# EAGLE board Main (EAGLE 9.6.2)
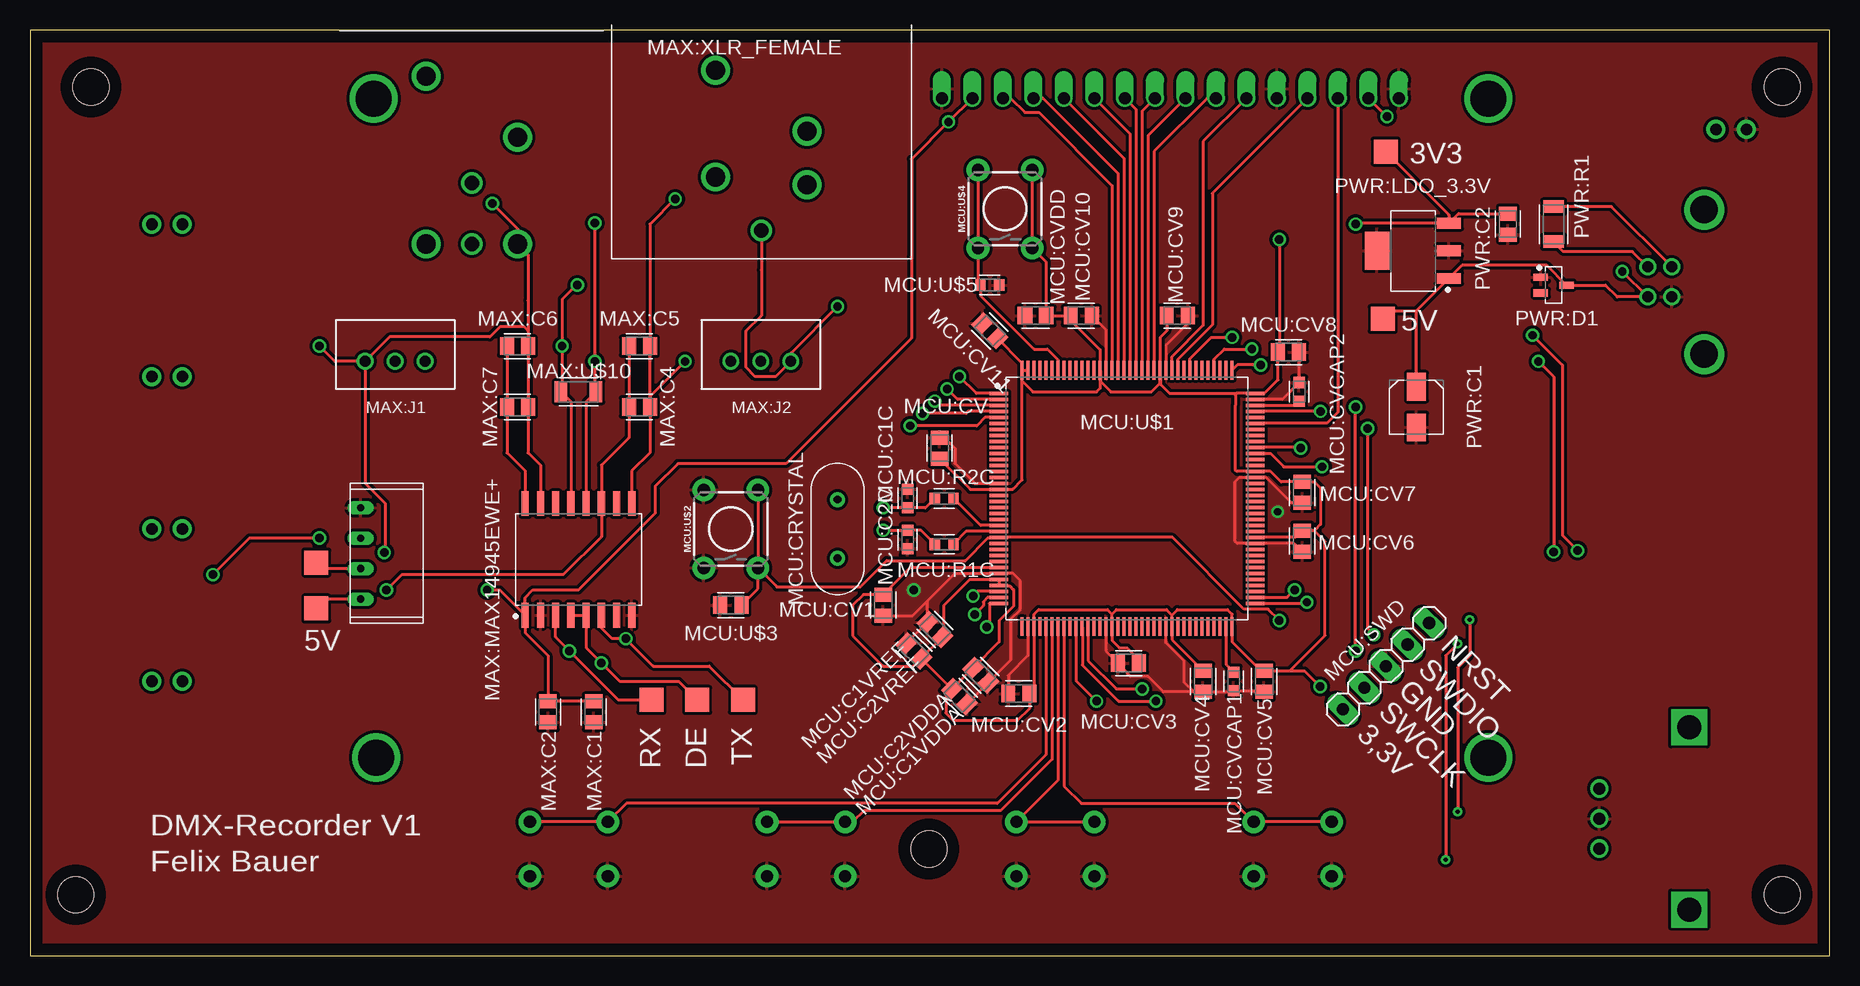
[diagram p0: board, top side]
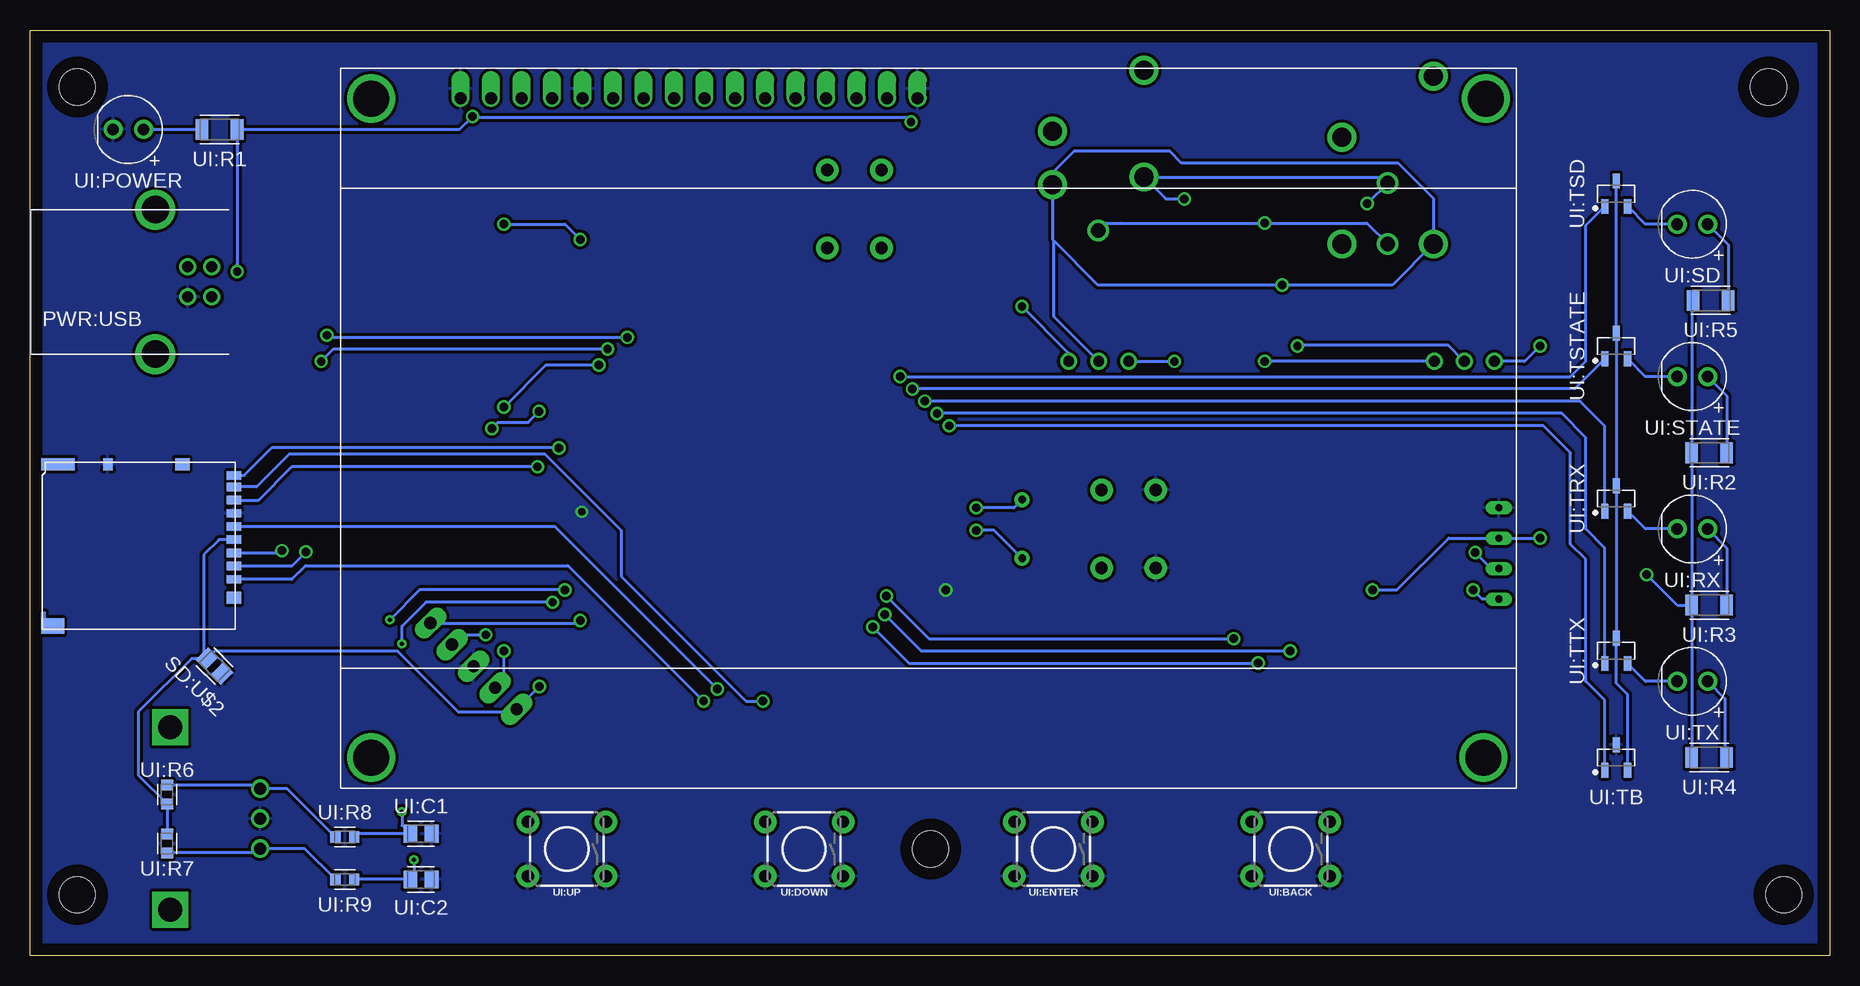
[diagram p1: board, bottom side, seen from below]

Size 150 x 77.14 mm. Coordinates in mm from the lower left corner, seen from the top.
Outline: 0,0 150,0 150,77.14 0,77.14 0,0
Copper layers (1*16): Top 0.035mm / dielectric 1.5mm / Bottom 0.035mm
Design rules "default": minimum track width 6mil, minimum drill 0.35mm, track to track 6mil, track to pad 6mil, pad to pad 6mil, via to via 6mil, smd to smd 6mil, copper to edge 40mil, drill to drill 6mil, minimum pad ring 10mil, minimum via ring 8mil, stop-mask expansion 4mil, vias tented up to drill 0mil, thermal gap 10mil
Holes 3 mm at 5.08,72.39 146.05,72.39 146.05,5.08 3.81,5.08 74.93,8.89

## Footprints (pad centres in the part's own frame; a part is rotated, then mirrored left to right if it is on the bottom)
LCD = drill 1 offset: A 45.56,57.5; D0 25.24,57.5; D1 27.78,57.5; D2 30.32,57.5; D3 32.86,57.5; D4 35.4,57.5; D5 37.94,57.5; D6 40.48,57.5; D7 43.02,57.5; E 22.7,57.5; K 48.1,57.5; RS 17.62,57.5; RW 20.16,57.5; V0 15.08,57.5; VDD 12.54,57.5; VSS 10,57.5 | drill 3: P16 2.54,2.54; P17 95.25,2.54; P18 2.54,57.46; P19 95.46,57.46
CAPC2012X100N = smd 1.165 x 1.465: 1 -0.875,0; 2 0.875,0
CAPC2012X90N = smd 1.165 x 1.465: 1 -0.88,0; 2 0.88,0
5V/5V_DC_CONVERTER_TRACO = drill 0.6 long: +VIN -4.572,-0.889; +VOUT -9.652,-0.889; -VIN -2.032,-0.889; -VOUT -7.112,-0.889
B3B-XH-A = drill 0.9: 1 0,0; 2 2.5,0; 3 5,0
SOIC127P1032X265-16N = smd 2.052 x 0.589: 1 -4.654,4.445; 2 -4.654,3.175; 3 -4.654,1.905; 4 -4.654,0.635; 5 -4.654,-0.635; 6 -4.654,-1.905; 7 -4.654,-3.175; 8 -4.654,-4.445; 9 4.654,-4.445; 10 4.654,-3.175; 11 4.654,-1.905; 12 4.654,-0.635; 13 4.654,0.635; 14 4.654,1.905; 15 4.654,3.175; 16 4.654,4.445
MESSPUNKT = smd 2 x 2: P$1 1,1
RESC3115X56N = smd 1.05 x 1.72: 1 -1.46,0; 2 1.46,0
NC3FAAH-0 = drill 1.6: 1 -3.81,4.45; 2 3.81,3.81; MOUNT -3.81,13.34; MOUNT2 3.81,8.26 | drill 1.2: 3 0,0
NC3MBH-B = drill 1.6: 1 3.81,-17.78; 2 -3.81,-17.78; MH1 3.81,-8.89; MH2 -3.81,-3.81 | drill 1.2: 3 0,-17.78; G 0,-12.7
CAPC1608X97N = smd 0.917 x 0.97: 1 -0.776,0; 2 0.776,0
XTALRR488W43L1077T434H350B = drill 0.63 pad 1.23: 1 -2.44,0; 2 2.44,0
CAPC1608X90N = smd 0.921 x 0.97: 1 -0.775,0; 2 0.775,0
CAPC2012X140N = smd 1.24 x 1.465: 1 -0.885,0; 2 0.885,0
RESC1608X55N = smd 0.87 x 0.979: 1 -0.78,0; 2 0.78,0
1X05 = drill 1.016 long: 1 -5.08,0; 2 -2.54,0; 3 0,0; 4 2.54,0; 5 5.08,0
QFP50P2200X2200X160-144N = smd 1.559 x 0.28: 1 -10.678,8.75; 2 -10.678,8.25; 3 -10.678,7.75; 4 -10.678,7.25; 5 -10.678,6.75; 6 -10.678,6.25; 7 -10.678,5.75; 8 -10.678,5.25; 9 -10.678,4.75; 10 -10.678,4.25; 11 -10.678,3.75; 12 -10.678,3.25; 13 -10.678,2.75; 14 -10.678,2.25; 15 -10.678,1.75; 16 -10.678,1.25; 17 -10.678,0.75; 18 -10.678,0.25; 19 -10.678,-0.25; 20 -10.678,-0.75; 21 -10.678,-1.25; 22 -10.678,-1.75; 23 -10.678,-2.25; 24 -10.678,-2.75; 25 -10.678,-3.25; 26 -10.678,-3.75; 27 -10.678,-4.25; 28 -10.678,-4.75; 29 -10.678,-5.25; 30 -10.678,-5.75; 31 -10.678,-6.25; 32 -10.678,-6.75; 33 -10.678,-7.25; 34 -10.678,-7.75; 35 -10.678,-8.25; 36 -10.678,-8.75; 73 10.678,-8.75; 74 10.678,-8.25; 75 10.678,-7.75; 76 10.678,-7.25; 77 10.678,-6.75; 78 10.678,-6.25; 79 10.678,-5.75; 80 10.678,-5.25; 81 10.678,-4.75; 82 10.678,-4.25; 83 10.678,-3.75; 84 10.678,-3.25; 85 10.678,-2.75; 86 10.678,-2.25; 87 10.678,-1.75; 88 10.678,-1.25; 89 10.678,-0.75; 90 10.678,-0.25; 91 10.678,0.25; 92 10.678,0.75; 93 10.678,1.25; 94 10.678,1.75; 95 10.678,2.25; 96 10.678,2.75; 97 10.678,3.25; 98 10.678,3.75; 99 10.678,4.25; 100 10.678,4.75; 101 10.678,5.25; 102 10.678,5.75; 103 10.678,6.25; 104 10.678,6.75; 105 10.678,7.25; 106 10.678,7.75; 107 10.678,8.25; 108 10.678,8.75 | smd 0.28 x 1.559: 37 -8.75,-10.678; 38 -8.25,-10.678; 39 -7.75,-10.678; 40 -7.25,-10.678; 41 -6.75,-10.678; 42 -6.25,-10.678; 43 -5.75,-10.678; 44 -5.25,-10.678; 45 -4.75,-10.678; 46 -4.25,-10.678; 47 -3.75,-10.678; 48 -3.25,-10.678; 49 -2.75,-10.678; 50 -2.25,-10.678; 51 -1.75,-10.678; 52 -1.25,-10.678; 53 -0.75,-10.678; 54 -0.25,-10.678; 55 0.25,-10.678; 56 0.75,-10.678; 57 1.25,-10.678; 58 1.75,-10.678; 59 2.25,-10.678; 60 2.75,-10.678; 61 3.25,-10.678; 62 3.75,-10.678; 63 4.25,-10.678; 64 4.75,-10.678; 65 5.25,-10.678; 66 5.75,-10.678; 67 6.25,-10.678; 68 6.75,-10.678; 69 7.25,-10.678; 70 7.75,-10.678; 71 8.25,-10.678; 72 8.75,-10.678; 109 8.75,10.678; 110 8.25,10.678; 111 7.75,10.678; 112 7.25,10.678; 113 6.75,10.678; 114 6.25,10.678; 115 5.75,10.678; 116 5.25,10.678; 117 4.75,10.678; 118 4.25,10.678; 119 3.75,10.678; 120 3.25,10.678; 121 2.75,10.678; 122 2.25,10.678; 123 1.75,10.678; 124 1.25,10.678; 125 0.75,10.678; 126 0.25,10.678; 127 -0.25,10.678; 128 -0.75,10.678; 129 -1.25,10.678; 130 -1.75,10.678; 131 -2.25,10.678; 132 -2.75,10.678; 133 -3.25,10.678; 134 -3.75,10.678; 135 -4.25,10.678; 136 -4.75,10.678; 137 -5.25,10.678; 138 -5.75,10.678; 139 -6.25,10.678; 140 -6.75,10.678; 141 -7.25,10.678; 142 -7.75,10.678; 143 -8.25,10.678; 144 -8.75,10.678
TACTILE_SWITCH_PTH_6.0MM = drill 1.016 pad 1.88: 1 -3.251,2.261; 2 3.251,2.261; 3 -3.251,-2.261; 4 3.251,-2.261
CAPAE430X610N = smd 2.312 x 1.579: 1 -1.7,0; 2 1.7,0
SOT65P237X111-3N = smd 1.198 x 0.602: 1 -1.077,0.65; 2 -1.077,-0.65; 3 1.077,0
SOT230P700X180-4N = smd 2.029 x 0.889: GND1 -2.99,0; VIN -2.99,2.3; VOUT -2.99,-2.3 | smd 2.029 x 3.189: GND2 2.99,0
USB-TYPE_B_CONNECTOR = drill 0.92: D+ 1.25,1; D- 1.25,-1; GND -1.25,1; VCC -1.25,-1 | drill 2.3: MH1 -6.02,3.71; MH2 6.02,3.71
DM3AT-SF-PEJM5 = smd 1 x 0.8: CARD_DETECTION_SWITCH(A) -9.6,-9.9 | smd 0.7 x 1.2: CARD_DETECTION_SWITCH(B) -8.65,0.6; CD/DAT3 -1.1,0.6; CLK -4.4,0.6; CMD -2.2,0.6; DAT0 -6.6,0.6; DAT1 -7.7,0.6; DAT2 0,0.6; VDD -3.3,0.6; VSS -5.5,0.6 | smd 1 x 1.2: MOUNT1 1.55,0.6; MOUNT5 -9.6,-3.7 | smd 1.3 x 1.9: MOUNT2 3.9,-14.5 | smd 1 x 2.8: MOUNT3 -9.6,-14.05
CAPC2012X145N = smd 1.133 x 1.465: 1 -0.891,0; 2 0.891,0
EC12E2420404 = drill 1: A -2.5,0; B 2.5,0; C 0,0 | drill 2 square: MH1 -7.6,7.5; MH2 7.6,7.5
LED_5MM_BLUE = drill 0.981 pad 1.581: 1 -1.27,0; 2 1.27,0
LED_5MM_YELLOW = drill 0.981 pad 1.581: 1 -1.27,0; 2 1.27,0
LED_5MM_GREEN = drill 0.981 pad 1.581: 1 -1.27,0; 2 1.27,0
LED_5MM_RED = drill 0.981 pad 1.581: 1 -1.27,0; 2 1.27,0
SOT95P237X111-3N = smd 1.232 x 0.602: 1 -1.06,0.95; 2 -1.06,-0.95; 3 1.06,0

## Placement (x,y rotation side)
LCD:U$1  LCD_4X202004A  [LCD]  124.11,13.97 0 bottom
MAX:C1  1uF  [CAPC2012X100N]  46.99,20.32 270 top
MAX:C2  0.1uF  [CAPC2012X90N]  43.18,20.32 270 top
MAX:C4  0.1uF  [CAPC2012X90N]  50.8,45.72 0 top
MAX:C5  1uF  [CAPC2012X100N]  50.8,50.8 0 top
MAX:C6  0.1uF  [CAPC2012X90N]  40.64,50.8 0 top
MAX:C7  1uF  [CAPC2012X100N]  40.64,45.72 0 top
MAX:DC/DC  CONVERTER_5V/5V_DCTRACO  [5V/5V_DC_CONVERTER_TRACO]  26.67,39.37 90 top
MAX:J1  3A/250V  [B3B-XH-A]  27.94,49.53 0 top
MAX:J2  3A/250V  [B3B-XH-A]  58.42,49.53 0 top
MAX:MAX14945EWE+  DRIVER_MAX14945EWE+  [SOIC127P1032X265-16N]  45.72,33.02 90 top
MAX:U$2  MESSPUNKT  [MESSPUNKT]  22.86,31.75 0 top
MAX:U$3  MESSPUNKT  [MESSPUNKT]  22.86,27.94 0 top
MAX:U$4  MESSPUNKT  [MESSPUNKT]  58.42,20.32 0 top
MAX:U$5  MESSPUNKT  [MESSPUNKT]  54.61,20.32 0 top
MAX:U$6  MESSPUNKT  [MESSPUNKT]  50.8,20.32 0 top
MAX:U$10  120  [RESC3115X56N]  45.72,46.99 180 top
MAX:XLR_FEMALE  CONNECTOR_XLR_FEMALE_NC3FAAH-0  [NC3FAAH-0]  60.96,60.44 0 top
MAX:XLR_MALE  CONNECTOR_XLR_MALE_NC3MBH-B  [NC3MBH-B]  36.83,77.09 0 top
MCU:C1C  26pF  [CAPC1608X97N]  73.15,38.1 270 top
MCU:C1VDDA  1uF  [CAPC2012X100N]  79.25,23.37 315 top
MCU:C1VREF  1uF  [CAPC2012X100N]  75.44,27.18 135 top
MCU:C2C  26pF  [CAPC1608X97N]  73.15,34.67 270 top
MCU:C2VDDA  0.1uF  [CAPC2012X90N]  77.47,21.59 315 top
MCU:C2VREF  0.1uF  [CAPC2012X90N]  73.66,25.4 135 top
MCU:CRYSTAL  25MHz  [XTALRR488W43L1077T434H350B]  67.31,35.56 270 top
MCU:CV  0.1uF  [CAPC2012X90N]  75.82,42.29 90 top
MCU:CV1  0.1uF  [CAPC2012X90N]  71.12,29.21 270 top
MCU:CV2  0.1uF  [CAPC2012X90N]  82.42,21.84 180 top
MCU:CV3  0.1uF  [CAPC2012X90N]  91.57,24.38 180 top
MCU:CV4  0.1uF  [CAPC2012X90N]  97.79,22.86 270 top
MCU:CV5  0.1uF  [CAPC2012X90N]  102.87,22.86 270 top
MCU:CV6  0.1uF  [CAPC2012X90N]  106.05,34.54 270 top
MCU:CV7  0.1uF  [CAPC2012X90N]  106.05,38.61 270 top
MCU:CV8  0.1uF  [CAPC2012X90N]  104.9,50.29 0 top
MCU:CV9  0.1uF  [CAPC2012X90N]  95.63,53.34 0 top
MCU:CV10  0.1uF  [CAPC2012X90N]  87.63,53.34 0 top
MCU:CV11  0.1uF  [CAPC2012X90N]  80.01,52.07 135 top
MCU:CVCAP1  2,2uF  [CAPC1608X90N]  100.33,22.86 270 top
MCU:CVCAP2  2,2uF  [CAPC1608X90N]  105.79,46.99 90 top
MCU:CVDD  4,7uF  [CAPC2012X140N]  83.82,53.34 180 top
MCU:R1C  1k2  [RESC1608X55N]  76.2,34.29 0 top
MCU:R2C  0  [RESC1608X55N]  76.2,38.1 0 top
MCU:SWD  PINHD-1X5  [1X05]  113.03,24.13 45 top
MCU:U$1  STM32F446ZELQFP144  [QFP50P2200X2200X160-144N]  91.44,38.1 0 top
MCU:U$2  BUTTON_6MM  [TACTILE_SWITCH_PTH_6.0MM]  58.42,35.56 90 top
MCU:U$3  0.1uF  [CAPC2012X90N]  58.42,29.21 180 top
MCU:U$4  BUTTON_6MM  [TACTILE_SWITCH_PTH_6.0MM]  81.28,62.23 90 top
MCU:U$5  10k  [RESC1608X55N]  80.01,55.88 0 top
PWR:C1  10uF  [CAPAE430X610N]  115.57,45.72 270 top
PWR:C2  1uF  [CAPC2012X100N]  123.19,60.96 270 top
PWR:D1  ZDIODEBZX84C6V2LT1G  [SOT65P237X111-3N]  127,55.88 0 top
PWR:LDO_3.3V  LDO_TC1262-3.3VDB  [SOT230P700X180-4N]  115.28,58.74 180 top
PWR:R1  120  [RESC3115X56N]  127,60.96 270 top
PWR:U$5  MESSPUNKT  [MESSPUNKT]  111.76,52.07 0 top
PWR:U$6  MESSPUNKT  [MESSPUNKT]  112,66 0 top
PWR:USB  CONNECTOR_USB-TYPE_B61400416121  [USB-TYPE_B_CONNECTOR]  135.84,56.15 90 bottom
SD:U$1  CONNECTOR_DM3AT-SF-PEJM5  [DM3AT-SF-PEJM5]  133.6,31.37 270 bottom
SD:U$2  0.1uF  [CAPC2012X90N]  134.62,24.13 315 bottom
UI:BACK  BUTTON_6MM  [TACTILE_SWITCH_PTH_6.0MM]  44.91,8.89 180 bottom
UI:C1  10nF  [CAPC2012X145N]  117.41,10.16 0 bottom
UI:C2  10nF  [CAPC2012X145N]  117.41,6.35 0 bottom
UI:DOWN  BUTTON_6MM  [TACTILE_SWITCH_PTH_6.0MM]  85.47,8.89 180 bottom
UI:ENCODER  ENCODER  [EC12E2420404]  130.81,11.43 90 bottom
UI:ENTER  BUTTON_6MM  [TACTILE_SWITCH_PTH_6.0MM]  64.69,8.89 180 bottom
UI:POWER  LEDBLUE  [LED_5MM_BLUE]  141.81,68.85 180 bottom
UI:R1  120  [RESC3115X56N]  134.19,68.85 180 bottom
UI:R2  120  [RESC3115X56N]  10.03,41.91 0 bottom
UI:R3  120  [RESC3115X56N]  10.03,29.21 0 bottom
UI:R4  120  [RESC3115X56N]  10.03,16.51 0 bottom
UI:R5  120  [RESC3115X56N]  9.91,54.61 0 bottom
UI:R6  10k  [RESC1608X55N]  138.57,13.43 90 bottom
UI:R7  10k  [RESC1608X55N]  138.57,9.35 270 bottom
UI:R8  10k  [RESC1608X55N]  123.76,9.89 180 bottom
UI:R9  10k  [RESC1608X55N]  123.76,6.35 0 bottom
UI:RX  LEDYELLOW  [LED_5MM_YELLOW]  11.43,35.56 180 bottom
UI:SD  LEDGREEN  [LED_5MM_GREEN]  11.43,60.96 180 bottom
UI:STATE  LEDRED  [LED_5MM_RED]  11.43,48.26 180 bottom
UI:TB  TRANSISTOR_NPNMMBTH10LT3G  [SOT95P237X111-3N]  17.78,16.51 90 bottom
UI:TRX  TRANSISTOR_NPNMMBTH10LT3G  [SOT95P237X111-3N]  17.78,38.1 90 bottom
UI:TSD  TRANSISTOR_NPNMMBTH10LT3G  [SOT95P237X111-3N]  17.78,63.5 90 bottom
UI:TSTATE  TRANSISTOR_NPNMMBTH10LT3G  [SOT95P237X111-3N]  17.78,50.8 90 bottom
UI:TTX  TRANSISTOR_NPNMMBTH10LT3G  [SOT95P237X111-3N]  17.78,25.4 90 bottom
UI:TX  LEDBLUE  [LED_5MM_BLUE]  11.43,22.86 180 bottom
UI:UP  BUTTON_6MM  [TACTILE_SWITCH_PTH_6.0MM]  105.25,8.89 180 bottom

## Library data of the parts
LCD:U$1 MAX:DC/DC MAX:MAX14945EWE+ MAX:U$2-MAX:U$6 MAX:XLR_FEMALE MAX:XLR_MALE MCU:U$1 MCU:U$2 MCU:U$4 PWR:D1 PWR:LDO_3.3V PWR:U$5 PWR:U$6 SD:U$1 UI:BACK UI:DOWN UI:ENCODER UI:ENTER UI:POWER UI:RX UI:SD UI:STATE UI:TB UI:TRX UI:TSD UI:TSTATE UI:TTX UI:TX UI:UP = BA Parts
MAX:C1 MAX:C5 MAX:C7 MCU:C1VDDA MCU:C1VREF PWR:C2 = BA Parts; DATASHEET: https://docs.rs-online.com/babb/0900766b817076dd.pdf; PACKAGE: 0805 (2012M)
MAX:C2 MAX:C4 MAX:C6 MCU:C2VDDA MCU:C2VREF MCU:CV MCU:CV1-MCU:CV11 MCU:U$3 SD:U$2 = BA Parts; DATASHEET: https://docs.rs-online.com/d3ac/0900766b802d4698.pdf; PACKAGE: 0805 (2012M)
MAX:J1 MAX:J2 = BA Parts; CATEGORY: CONNECTOR; DESCRIPTION: 2.5mm pitch/disconnectable crimp style connector; MANUFACTURER: JST (XH connector); MPN: B3B-XH-A; PART_STATUS: ACTIVE; ROHS_COMPLIANT: COMPLIANT; SERIES: B3B-XH-A; SUB_CATEGORY: THROUGH HOLE CONNECTOR; TYPE: SIDE ENTRY
MAX:U$10 PWR:R1 UI:R1-UI:R5 = BA Parts; DATASHEET: https://docs.rs-online.com/2716/0900766b813e2403.pdf; PACKAGE: 1206 (3216M)
MCU:C1C MCU:C2C = BA Parts; DATASHEET: https://docs.rs-online.com/16fc/0900766b80117c5f.pdf; PACKAGE: 0603
MCU:CRYSTAL = BA Parts; DATASHEET: https://docs.rs-online.com/4d75/0900766b80dbbbbd.pdf; FREQ: 25MHz
MCU:CVCAP1 MCU:CVCAP2 = BA Parts; DATASHEET: https://docs.rs-online.com/abc5/0900766b816ffde5.pdf; PACKAGE: 0603 (1608M)
MCU:CVDD = BA Parts; DATASHEET: https://docs.rs-online.com/089c/0900766b81707569.pdf; PACKAGE: 0805 (2012M)
MCU:R1C MCU:R2C MCU:U$5 UI:R6-UI:R9 = BA Parts; DATASHEET: https://docs.rs-online.com/e925/0900766b814c54cb.pdf; PACKAGE: 0805 (2012M)
MCU:SWD = Connector; CATEGORY: CONNECTOR; SUB-CATEGORY: PIN-HEADER
PWR:C1 = BA Parts; DATASHEET: https://docs.rs-online.com/d3dd/0900766b80df09a1.pdf
PWR:USB = BA Parts; DATASHEET: https://docs.rs-online.com/8337/0900766b81023ab5.pdf
UI:C1 UI:C2 = BA Parts; DATASHEET: https://docs.rs-online.com/16fc/0900766b80117c5f.pdf; PACKAGE: 0805 (2012M)

## Nets
3,3V: MCU:C1VDDA.1 MCU:C1VREF.1 MCU:C2VDDA.1 MCU:C2VREF.1 MCU:CV1.1 MCU:CV2.1 MCU:CV3.1 MCU:CV4.1 MCU:CV5.1 MCU:CV6.1 MCU:CV7.1 MCU:CV8.1 MCU:CV9.1 MCU:CV10.1 MCU:CV11.1 MCU:CV.1 MCU:CVDD.1 MCU:SWD.1 MCU:U$1.17 MCU:U$1.30 MCU:U$1.32 MCU:U$1.33 MCU:U$1.39 MCU:U$1.52 MCU:U$1.62 MCU:U$1.72 MCU:U$1.84 MCU:U$1.95 MCU:U$1.108 MCU:U$1.121 MCU:U$1.131 MCU:U$1.143 MCU:U$1.144 MCU:U$4.3 MCU:U$4.4 PWR:C2.1 PWR:LDO_3.3V.VOUT PWR:U$6.P$1 SD:U$1.VDD SD:U$2.1 UI:R6.1 UI:R7.1
+5V: LCD:U$1.A LCD:U$1.VDD MAX:C1.1 MAX:C2.1 MAX:DC/DC.+VIN MAX:MAX14945EWE+.1 PWR:C1.1 PWR:D1.3 PWR:LDO_3.3V.VIN PWR:U$5.P$1 PWR:USB.VCC UI:R1.1 UI:R2.1 UI:R3.1 UI:R4.1 UI:R5.1
GND: LCD:U$1.K LCD:U$1.RW LCD:U$1.VSS MAX:C1.2 MAX:C2.2 MAX:DC/DC.-VIN MAX:MAX14945EWE+.2 MAX:MAX14945EWE+.8 MCU:C1C.1 MCU:C1VDDA.2 MCU:C1VREF.2 MCU:C2C.2 MCU:C2VDDA.2 MCU:C2VREF.2 MCU:CV1.2 MCU:CV2.2 MCU:CV3.2 MCU:CV4.2 MCU:CV5.2 MCU:CV6.2 MCU:CV7.2 MCU:CV8.2 MCU:CV9.2 MCU:CV10.2 MCU:CV11.2 MCU:CV.2 MCU:CVCAP1.2 MCU:CVCAP2.2 MCU:CVDD.2 MCU:SWD.3 MCU:U$1.16 MCU:U$1.31 MCU:U$1.38 MCU:U$1.51 MCU:U$1.61 MCU:U$1.83 MCU:U$1.94 MCU:U$1.107 MCU:U$1.120 MCU:U$1.130 MCU:U$2.1 MCU:U$2.2 MCU:U$3.2 MCU:U$5.2 PWR:C1.2 PWR:C2.2 PWR:D1.1 PWR:LDO_3.3V.GND1 PWR:LDO_3.3V.GND2 PWR:USB.GND SD:U$1.CARD_DETECTION_SWITCH(A) SD:U$1.VSS SD:U$2.2 UI:BACK.1 UI:BACK.2 UI:C1.2 UI:C2.2 UI:DOWN.1 UI:DOWN.2 UI:ENCODER.C UI:ENTER.1 UI:ENTER.2 UI:POWER.2 UI:TB.3 UI:UP.1 UI:UP.2
MAX:GNDB: MAX:C4.2 MAX:C5.2 MAX:C6.2 MAX:C7.2 MAX:DC/DC.-VOUT MAX:J1.1 MAX:J2.1 MAX:MAX14945EWE+.9 MAX:MAX14945EWE+.15 MAX:U$2.P$1 MAX:XLR_FEMALE.1 MAX:XLR_MALE.1 MAX:XLR_MALE.G
MAX:N$1: MAX:J1.3 MAX:J2.3 MAX:MAX14945EWE+.12 MAX:U$10.1 MAX:XLR_FEMALE.3 MAX:XLR_MALE.3
MAX:N$2: MAX:J1.2 MAX:J2.2 MAX:MAX14945EWE+.13 MAX:U$10.2 MAX:XLR_FEMALE.2 MAX:XLR_MALE.2
MAX:VDDB: MAX:C6.1 MAX:C7.1 MAX:MAX14945EWE+.16
MAX:VLDO: MAX:C4.1 MAX:C5.1 MAX:DC/DC.+VOUT MAX:MAX14945EWE+.11 MAX:U$3.P$1
MCU:BOOT0: MCU:U$1.138 MCU:U$4.1 MCU:U$4.2 MCU:U$5.1
MCU:N$2: MCU:C1C.2 MCU:CRYSTAL.1 MCU:R2C.1
MCU:N$6: MCU:C2C.1 MCU:CRYSTAL.2 MCU:R1C.1
MCU:NRST: MCU:SWD.5 MCU:U$1.25 MCU:U$2.3 MCU:U$2.4 MCU:U$3.1
MCU:OSC_IN: MCU:R2C.2 MCU:U$1.23
MCU:OSC_OUT: MCU:R1C.2 MCU:U$1.24
MCU:SWCLK: MCU:SWD.2 MCU:U$1.109
MCU:SWDIO: MCU:SWD.4 MCU:U$1.105
MCU:VCAP1: MCU:CVCAP1.1 MCU:U$1.71
MCU:VCAP2: MCU:CVCAP2.1 MCU:U$1.106
N$1: MCU:U$1.116 SD:U$1.CMD
N$2: MCU:U$1.48 SD:U$1.CLK
N$3: MCU:U$1.112 SD:U$1.CD/DAT3
N$4: MAX:MAX14945EWE+.3 MAX:U$6.P$1 MCU:U$1.35
N$5: MAX:MAX14945EWE+.6 MAX:U$4.P$1 MCU:U$1.34
N$6: MCU:U$1.47 SD:U$1.DAT2
N$7: MCU:U$1.46 SD:U$1.DAT1
N$8: MCU:U$1.98 SD:U$1.DAT0
N$9: LCD:U$1.V0 MCU:U$1.103
N$10: MCU:U$1.74 UI:C1.1 UI:R8.1
N$11: LCD:U$1.E MCU:U$1.119
N$12: LCD:U$1.RS MCU:U$1.118
N$13: LCD:U$1.D0 MCU:U$1.122
N$14: LCD:U$1.D1 MCU:U$1.123
N$15: LCD:U$1.D4 MCU:U$1.126
N$16: LCD:U$1.D5 MCU:U$1.127
N$17: LCD:U$1.D6 MCU:U$1.128
N$18: LCD:U$1.D7 MCU:U$1.129
N$19: LCD:U$1.D2 MCU:U$1.124
N$20: LCD:U$1.D3 MCU:U$1.125
N$21: MCU:U$1.73 UI:C2.1 UI:R9.2
N$22: MCU:U$1.41 UI:BACK.3 UI:BACK.4
N$23: MCU:U$1.42 UI:ENTER.3 UI:ENTER.4
N$24: MCU:U$1.43 UI:DOWN.3 UI:DOWN.4
N$25: MCU:U$1.44 UI:UP.3 UI:UP.4
N$26: MAX:MAX14945EWE+.4 MAX:MAX14945EWE+.5 MAX:U$5.P$1 MCU:U$1.36
N$27: MCU:U$1.2 UI:TSTATE.1
N$28: MCU:U$1.5 UI:TB.1
N$29: MCU:U$1.4 UI:TTX.1
N$30: MCU:U$1.3 UI:TRX.1
N$31: MCU:U$1.1 UI:TSD.1
N$32: MCU:U$1.99 SD:U$1.CARD_DETECTION_SWITCH(B)
PWR:D+: PWR:R1.1 PWR:USB.D+
PWR:D-: PWR:R1.2 PWR:USB.D-
UI:N$1: UI:POWER.1 UI:R1.2
UI:N$2: UI:R2.2 UI:STATE.1
UI:N$3: UI:R3.2 UI:RX.1
UI:N$4: UI:R4.2 UI:TX.1
UI:N$7: UI:R5.2 UI:SD.1
UI:N$8: UI:TB.2 UI:TRX.3 UI:TSD.3 UI:TSTATE.3 UI:TTX.3
UI:N$9: UI:STATE.2 UI:TSTATE.2
UI:N$10: UI:RX.2 UI:TRX.2
UI:N$11: UI:TTX.2 UI:TX.2
UI:N$12: UI:SD.2 UI:TSD.2
UI:N$13: UI:ENCODER.B UI:R6.2 UI:R8.2
UI:N$14: UI:ENCODER.A UI:R7.2 UI:R9.1

## Tracks (layer width: path | path; a pad name or v marks a point on that pad's centre or on a via)
3,3V  (via drill 0.7)
  Top 0.25: MCU:U$1.72 100.19,28.45 100.2,28.45 | PWR:U$6.P$1 118.27,61.73 PWR:LDO_3.3V.VOUT | MCU:U$1.144 MCU:U$1.143
  Top 0.254: MCU:CV5.1 102.6,23.74 100.19,26.15 MCU:U$1.72 | MCU:CV4.1 95.19,26.34 MCU:U$1.62 95.19,28.39 | MCU:CV3.1 92.45,24.65 91.44,25.65 90.81,25.65 90.19,26.27 MCU:U$1.52 90.19,28.47 | MCU:U$1.30 73.38,32.35 MCU:CV1.1 69.46,30.09 68.58,29.21 68.58,26.67 71.12,24.13 73.64,24.13 MCU:C2VREF.1 | MCU:CV.1 78.38,38.85 MCU:U$1.17 80.8,38.88 81.93,38.88 82.69,39.64 MCU:U$1.144 | MCU:U$1.144 82.69,49.39 MCU:CV11.1 | MCU:U$1.131 89.19,50.51 86.75,52.95 MCU:CV10.1 MCU:CVDD.1 84.7,57.81 MCU:U$4.3 MCU:U$4.4 | MCU:CV9.1 94.75,52.07 94.19,51.51 MCU:U$1.121 94.19,48.26 | MCU:U$1.84 105.47,34.85 MCU:CV6.1 107.06,35.42 | 107.06,35.42 107.57,35.93 107.57,38.99 107.07,39.49 MCU:CV7.1 104.28,39.49 103.41,40.35 MCU:U$1.95 100.62,40.35 100.46,40.51 100.46,45.85 100.46,46.73 100.46,46.74 100.57,46.85 | 95.19,28.39 95.63,28.83 99.82,28.83 100.2,28.45 | 90.19,28.47 90.55,28.83 94.75,28.83 95.19,28.39 | 90.19,28.47 89.83,28.83 84.07,28.83 83.69,28.45 MCU:U$1.39 83.69,22.23 MCU:CV2.1 83.3,20.57 82.29,19.56 76.99,19.56 76.34,20.2 76.34,21.7 MCU:C2VDDA.1 | MCU:C2VREF.1 MCU:C2VDDA.1 | MCU:C2VDDA.1 MCU:C1VDDA.1 80.79,26.15 80.79,27.92 82,29.13 82,30.5 81.68,30.82 80.8,30.82 MCU:U$1.33 MCU:U$1.32 78.34,31.35 76.2,29.21 76.2,26.7 MCU:C1VREF.1 MCU:C2VREF.1 | MCU:U$1.131 89.22,48.74 89.22,47.86 90.1,46.99 93.47,46.99 94.19,47.71 94.19,48.26 | 100.57,46.85 MCU:U$1.108 102.88,46.85 104.02,47.99 MCU:CV8.1 104.14,50.41 v104.14,59.69 | MCU:CV5.1 105.02,23.74 107.95,26.67 107.95,34.53 107.06,35.42 | MCU:CV5.1 106.23,23.74 v107.53,22.44 | MCU:U$1.131 89.19,47.28 88.9,46.99 83.6,46.99 82.69,47.9 MCU:U$1.144
  Top 0.254: 94.19,48.26 94.22,48.23 94.22,47.61 94.98,46.85 100.57,46.85 | PWR:C2.1 119.07,61.84 PWR:LDO_3.3V.VOUT 110.57,61.04 v110.49,60.96
  Bottom 0.25: MCU:SWD.1 v107.53,22.44
  Bottom 0.254: SD:U$1.VDD 134.24,34.67 135.5,33.41 135.5,25.01 SD:U$2.1 | UI:R7.1 UI:R6.1 140.97,15.05 140.97,20.32 136.54,24.75 SD:U$2.1 | SD:U$2.1 134.59,25.4 119.38,25.4 114.3,20.32 109.66,20.32 MCU:SWD.1 | v110.49,60.96 105.41,60.96 v104.14,59.69
+5V  (via drill 0.7)
  Top 0.25: LCD:U$1.VDD v113.11,69.93 | PWR:USB.VCC v132.73,57.01 | PWR:U$5.P$1 113.43,53.74 115.57,53.74 | 73.47,58.23 73.47,51.47 63,41 54,41 52.12,39.12 52.12,36.88
  Top 0.254: MAX:MAX14945EWE+.1 41.27,26.91 43.18,25.01 MAX:C2.1 MAX:C1.1 | MAX:MAX14945EWE+.1 41.27,29.84 41.91,30.48 45.72,30.48 52.12,36.88 | LCD:U$1.A v76.56,69.48 73.47,66.39 73.47,58.23 | PWR:USB.VCC 132.3,54.9 131.32,55.88 PWR:D1.3 126.43,57.53 119.36,57.53 PWR:LDO_3.3V.VIN 115.57,53.74 PWR:C1.1 | v38.1,30.48 39.16,30.48 MAX:MAX14945EWE+.1 | v24.13,34.8 18.29,34.8 v15.24,31.75
  Bottom 0.25: UI:R1.1 v132.73,57.01 | v113.11,69.93 113.03,69.85 109.95,69.85 | 80.17,69.85 76.93,69.85 v76.56,69.48 | MAX:DC/DC.+VIN v24.13,34.8
  Bottom 0.254: UI:R1.1 114.19,68.85 v113.11,69.93 | 109.95,69.85 80.17,69.85 | UI:R5.1 11.49,54.48 UI:R2.1 UI:R3.1 | UI:R3.1 UI:R4.1 | v38.1,30.48 36.07,30.48 31.75,34.8 MAX:DC/DC.+VIN | v15.24,31.75 12.7,29.21 UI:R3.1
GND  (via drill 0.6, 0.7)
  Top 0.254: 74.82,29.57 MCU:C1VREF.2 MCU:C2VREF.2 | 74.82,29.57 77.09,31.85 MCU:U$1.31 81.94,31.85 82.55,31.24 82.55,28.83 81.79,28.07 81.79,24.67 MCU:C1VDDA.2 MCU:C2VDDA.2 | MCU:CV4.2 97.01,21.98 96.23,22.76 96.23,24.54 94.69,26.07 MCU:U$1.61 | MCU:CV4.2 100.22,21.98 MCU:CVCAP1.2 102.76,22.09 MCU:CV5.2 | MCU:U$1.51 89.69,25.38 MCU:CV3.2 91.49,23.58 91.49,23.5 91.71,23.27 93.17,23.27 94.46,21.98 MCU:CV4.2 | MCU:U$1.38 83.19,25.02 81.54,23.37 MCU:CV2.2 | MCU:CV1.2 73.57,28.33 74.82,29.57 | MCU:CV.2 76.21,43.17 77.09,42.29 77.09,41.02 78.76,39.35 MCU:U$1.16 | MCU:CV10.2 89.69,52.16 MCU:U$1.130 | MCU:CV9.2 96.51,52.7 94.69,50.88 MCU:U$1.120 | MCU:CV8.2 105.78,47.77 MCU:CVCAP2.2 104.38,46.35 MCU:U$1.107 | MCU:CV7.2 105.15,37.73 103.03,39.85 MCU:U$1.94 100.81,39.85 100.46,39.5 100.46,34.54 100.65,34.35 MCU:U$1.83 105.36,34.35 MCU:CV6.2
  other vias: 73.66,30.48 104,37
  pour Top (isolate 0.254): 0,82.55 -7.62,74.93 -7.62,1.27 1.27,-7.62 147.32,-7.62 157.48,2.54 157.48,77.47 152.4,82.55
  pour Bottom (isolate 0.254): -1.27,82.55 -8.89,74.93 -8.89,1.27 0,-7.62 152.4,-7.62 158.75,-1.27 158.75,74.93 151.13,82.55
MAX:GNDB  (via drill 0.7)
  Top 0.25: 29.84,51.44 MAX:J1.1 25.4,49.53 v24.13,50.8 | MAX:XLR_MALE.1 41.52,58.43 41.52,54.61 | MAX:DC/DC.-VOUT 24.35,32.26 MAX:U$2.P$1
  Top 0.254: MAX:MAX14945EWE+.15 42.55,40.88 41.52,41.91 MAX:C7.2 MAX:C6.2 | MAX:C4.2 51.68,41.91 50.16,40.4 MAX:MAX14945EWE+.9 | v38.54,62.67 40.64,60.58 MAX:XLR_MALE.1 | 41.52,54.61 MAX:C6.2 | v53.78,63.06 51.67,60.96 MAX:C5.2 MAX:C4.2 | 29.84,51.44 29.97,51.56 38.35,51.56 39.24,52.45 41.14,52.45 41.52,52.07 MAX:C6.2 | MAX:J1.1 27.94,39.37 29.59,37.72 29.59,33.66 v29.53,33.59 | v54.6,49.53 51.68,46.61 MAX:C4.2
  Bottom 0.25: v29.53,33.59 28.19,32.26 MAX:DC/DC.-VOUT | v38.54,62.67 MAX:XLR_MALE.G 37.33,64.89 MAX:XLR_FEMALE.1 55.33,63.06 v53.78,63.06 | MAX:J2.1 v54.6,49.53 | v24.13,50.8 25.4,49.53 MAX:J1.1
MAX:N$1  (via drill 0.7)
  Top 0.25: v67.31,54.1 63.42,50.21 MAX:J2.3 | MAX:XLR_FEMALE.3 60.96,57.15
  Top 0.254: MAX:MAX14945EWE+.12 46.35,46.16 MAX:U$10.1 47.09,47.09 v47.09,49.53 v47.09,61.05 | MAX:J2.3 62.15,48.26 60.45,48.26 59.69,49.02 59.69,52.07 60.96,53.34 60.96,57.15
  Bottom 0.25: MAX:J2.3 63.42,50.21 v67.31,54.1 | MAX:XLR_FEMALE.3 60.34,61.05 59,61.05
  Bottom 0.254: MAX:J1.3 v47.09,49.53 | MAX:XLR_MALE.3 38.58,61.05 v47.09,61.05 59,61.05
MAX:N$2  (via drill 0.7)
  Top 0.254: MAX:U$10.2 44.35,46.9 | 44.35,46.9 45.09,46.16 MAX:MAX14945EWE+.13 | 44.35,46.9 v44.35,50.8 44.35,54.7 45.53,55.88 v45.62,55.88
  Bottom 0.25: MAX:J2.2 64.64,53.25 64.64,59.56 64.77,59.69 MAX:XLR_FEMALE.2 64.77,65.25 64.64,65.37 | 35.95,66.05 54.01,66.05 55,67.04
  Bottom 0.254: 35.95,66.05 33.02,63.12 MAX:XLR_MALE.2 36.45,55.88 v45.62,55.88 60.96,55.88 64.64,59.56 | 64.64,65.37 62.98,67.04 55,67.04 | MAX:J1.2 30.46,49.53 31.82,50.89 44.26,50.89 v44.35,50.8
MAX:VDDB
  Top 0.254: MAX:MAX14945EWE+.16 41.27,40.4 39.77,41.91 MAX:C7.1 MAX:C6.1
MAX:VLDO  (via drill 0.7)
  Top 0.25: MAX:DC/DC.+VOUT 24.64,29.72 MAX:U$3.P$1
  Top 0.254: MAX:C5.1 MAX:C4.1 49.92,43.18 47.62,40.88 MAX:MAX14945EWE+.11 47.62,34.92 44.45,31.75 30.99,31.75 v29.72,30.48
  Bottom 0.25: MAX:DC/DC.+VOUT 28.96,29.72 v29.72,30.48
MCU:BOOT0
  Top 0.254: MCU:U$1.138 85.69,49.66 84.8,50.55 83.69,50.55 79.23,55.01 MCU:U$5.1 79.02,56.09 MCU:U$4.1 MCU:U$4.2
MCU:N$2  (via drill 0.7)
  Top 0.254: MCU:R2C.1 74.64,37.32 MCU:C1C.2 v71.12,37.32
  Bottom 0.25: MCU:CRYSTAL.1 67.99,37.32 v71.12,37.32
MCU:N$6  (via drill 0.7)
  Top 0.254: MCU:R1C.1 74.26,35.45 MCU:C2C.1 v71.12,35.45
  Bottom 0.25: MCU:CRYSTAL.2 69.64,35.45 v71.12,35.45
MCU:NRST  (via drill 0.7)
  Top 0.254: MCU:U$2.3 62.26,30.73 69.22,30.73 71.41,32.93 77.96,32.93 79.85,34.82 80.73,34.82 MCU:U$1.25 95.24,34.85 101.2,28.88 103.2,28.88 v104.14,27.94 | MCU:U$2.4 MCU:U$2.3 | MCU:U$3.1 60.68,30.59 MCU:U$2.3
  Bottom 0.254: v104.14,27.94 104.36,27.72 MCU:SWD.5
MCU:OSC_IN
  Top 0.254: MCU:U$1.23 79.23,35.85 MCU:R2C.2
MCU:OSC_OUT
  Top 0.254: MCU:U$1.24 78.04,35.35 MCU:R1C.2
MCU:SWCLK  (via drill 0.7)
  Top 0.254: v110.49,25.4 v110.49,45.72 | v102.59,49.23 100.64,49.23 MCU:U$1.109
  Bottom 0.25: MCU:SWD.2 110.49,23.08 v110.49,25.4
  Bottom 0.254: v110.49,45.72 106.98,49.23 v102.59,49.23
MCU:SWDIO  (via drill 0.7)
  Top 0.25: v112.01,26.75 111.51,27.25 111.51,29.25
  Top 0.254: 111.51,29.25 v111.51,43.94 | v107.57,45.36 107.56,45.35 MCU:U$1.105
  Bottom 0.25: MCU:SWD.4 114.01,26.75 v112.01,26.75
  Bottom 0.254: v111.51,43.94 111,44.45 108.48,44.45 v107.57,45.36
MCU:VCAP1
  Top 0.25: MCU:U$1.71 99.69,24.27 MCU:CVCAP1.1
MCU:VCAP2
  Top 0.25: MCU:U$1.106 105.43,45.85 MCU:CVCAP2.1
N$1  (via drill 0.7)
  Top 0.254: MCU:U$1.116 96.69,49.75 98.47,51.53 v100.2,51.53 | v125.24,51.71 127.73,49.22 127.73,35.02 v129,33.75
  Bottom 0.254: v125.24,51.71 125.06,51.53 v100.2,51.53 | SD:U$1.CMD 129.18,33.57 v129,33.75
N$2  (via drill 0.7)
  Top 0.254: MCU:U$1.48 88.19,24.59 90.55,22.23 v92.71,22.23
  Bottom 0.254: SD:U$1.CLK 106.25,35.77 v92.71,22.23
N$3  (via drill 0.7)
  Top 0.254: MCU:U$1.112 98.69,49.69 99.55,50.55 v101.85,50.55 | v125.73,49.53 127,48.26 v127,33.66
  Bottom 0.254: v101.85,50.55 124.71,50.55 v125.73,49.53 | v127,33.66 128.19,32.47 SD:U$1.CD/DAT3
N$4  (via drill 0.7)
  Top 0.25: v44.96,25.4 49.04,21.32 MAX:U$6.P$1
  Top 0.254: v78.74,28.43 79.47,29.16 79.47,29.49 79.83,29.85 MCU:U$1.35 | MAX:MAX14945EWE+.3 43.81,26.54 v44.96,25.4
  Bottom 0.254: v78.74,28.43 75.71,25.4 v44.96,25.4
N$5  (via drill 0.7)
  Top 0.25: v49.66,26.42 51.94,24.13 56.61,24.13 MAX:U$4.P$1
  Top 0.254: v78.61,29.97 78.99,30.35 MCU:U$1.34 | v49.66,26.42 48.51,26.42 47.62,27.3 MAX:MAX14945EWE+.6
  Bottom 0.254: v78.61,29.97 75.06,26.42 v49.66,26.42
N$6  (via drill 0.7)
  Top 0.254: MCU:U$1.47 87.72,27.39 87.72,24.22 90.73,21.21 v93.85,21.21
  Bottom 0.254: v93.85,21.21 105.16,32.51 127.03,32.51 128.18,31.37 SD:U$1.DAT2
N$7  (via drill 0.7)
  Top 0.254: v88.9,21.21 87.19,22.92 MCU:U$1.46
  Bottom 0.254: SD:U$1.DAT1 131.11,39.07 128.4,41.78 107.06,41.78 100.71,35.43 100.71,31.62 90.3,21.21 v88.9,21.21
N$8  (via drill 0.7)
  Top 0.254: MCU:U$1.98 103.41,41.85 104.52,40.74 v107.7,40.74
  Bottom 0.254: v107.7,40.74 128.17,40.74 130.94,37.97 SD:U$1.DAT0
N$9
  Top 0.254: MCU:U$1.103 102.15,44.38 108.11,44.38 109.03,45.3 LCD:U$1.V0
N$10  (via drill 0.35, 0.7)
  Top 0.254: v105.41,30.48 104.78,29.85 MCU:U$1.74 | v120,28 120,25 119,24 v119,12
  Bottom 0.254: v105.41,30.48 117.52,30.48 v120,28 | 122.98,10.02 UI:R8.1 122.71,10.16 UI:C1.1 119,10.86 v119,12
N$11
  Top 0.254: MCU:U$1.119 95.19,49.92 97.79,52.52 97.79,67.85 LCD:U$1.E
N$12
  Top 0.254: MCU:U$1.118 95.69,49.72 98.54,52.57 98.54,63.52 LCD:U$1.RS
N$13
  Top 0.254: MCU:U$1.122 93.69,67.02 98.14,71.47 LCD:U$1.D0
N$14
  Top 0.254: LCD:U$1.D1 93.19,68.33 MCU:U$1.123
N$15
  Top 0.254: LCD:U$1.D4 91.69,68.49 MCU:U$1.126
N$16
  Top 0.254: LCD:U$1.D5 91.19,66.45 MCU:U$1.127
N$17
  Top 0.254: LCD:U$1.D6 84.42,71.47 90.69,65.2 MCU:U$1.128
N$18
  Top 0.254: MCU:U$1.129 90.19,64.17 84.09,70.27 82.93,70.27 81.73,71.47 LCD:U$1.D7
N$19
  Top 0.254: LCD:U$1.D2 92.69,70.37 MCU:U$1.124
N$20
  Top 0.254: LCD:U$1.D3 92.19,70.53 MCU:U$1.125
N$21  (via drill 0.35, 0.7)
  Top 0.254: v106.44,29.45 106.33,29.35 MCU:U$1.73 | v119,26 118,25 v118,8
  Bottom 0.254: v106.44,29.45 117,29.45 119,27.45 v119,26 | 122.65,6.35 UI:R9.2 UI:C2.1 118,6.65 v118,8
N$22
  Top 0.254: MCU:U$1.41 84.69,16.76 80.63,12.7 49.71,12.7 UI:BACK.4 UI:BACK.3
N$23
  Top 0.254: MCU:U$1.42 85.19,16.37 80.91,12.09 69.52,12.09 68.58,11.15 UI:ENTER.4 UI:ENTER.3
N$24
  Top 0.254: UI:DOWN.4 UI:DOWN.3 85.69,14.62 MCU:U$1.43
N$25
  Top 0.254: MCU:U$1.44 86.19,14.14 87.63,12.7 100.45,12.7 UI:UP.3 UI:UP.4
N$26  (via drill 0.7)
  Top 0.25: v47.62,24.38 49.15,22.86 54.07,22.86 MAX:U$5.P$1
  Top 0.254: MCU:U$1.36 79.97,29.35 79.97,27.61 v79.76,27.39 | v47.62,24.38 46.35,25.65 MAX:MAX14945EWE+.5 MAX:MAX14945EWE+.4
  Bottom 0.254: v79.76,27.39 76.75,24.38 v47.62,24.38
N$27  (via drill 0.7)
  Top 0.254: v76.44,47.23 77.33,46.35 MCU:U$1.2
  Bottom 0.254: UI:TSTATE.1 21.24,47.23 v76.44,47.23
N$28  (via drill 0.7)
  Top 0.254: MCU:U$1.5 79.62,44.85 78.92,44.16 v73.37,44.16
  Bottom 0.254: UI:TB.1 18.73,21.27 20.32,22.86 20.32,33.02 21.59,34.29 21.59,41.91 23.84,44.16 v73.37,44.16
N$29  (via drill 0.7)
  Top 0.254: MCU:U$1.4 78.2,45.35 78.04,45.18 v74.39,45.18
  Bottom 0.254: UI:TTX.1 18.73,33.97 20.32,35.56 20.32,43.18 22.32,45.18 v74.39,45.18
N$30  (via drill 0.7)
  Top 0.254: v75.42,46.21 75.78,45.85 MCU:U$1.3
  Bottom 0.254: UI:TRX.1 18.73,44.13 20.81,46.21 v75.42,46.21
N$31  (via drill 0.7)
  Top 0.254: v77.47,48.26 78.88,46.85 MCU:U$1.1
  Bottom 0.254: v77.47,48.26 21.59,48.26 20.32,49.53 20.32,60.85 UI:TSD.1
N$32  (via drill 0.7)
  Top 0.254: v105.92,42.32 105.89,42.35 MCU:U$1.99
  Bottom 0.254: v105.92,42.32 129.84,42.32 132.14,40.02 SD:U$1.CARD_DETECTION_SWITCH(B)
PWR:D+
  Top 0.254: PWR:USB.D+ 131.82,62.42 PWR:R1.1
PWR:D-
  Top 0.254: PWR:R1.2 127.83,58.67 133.57,58.67 PWR:USB.D-
UI:N$1
  Bottom 0.254: UI:POWER.1 UI:R1.2
UI:N$2
  Bottom 0.254: UI:STATE.1 8.57,46.67 UI:R2.2
UI:N$3
  Bottom 0.254: UI:RX.1 8.57,33.97 UI:R3.2
UI:N$4
  Bottom 0.254: UI:R4.2 8.73,16.89 8.73,21.43 UI:TX.1
UI:N$7
  Bottom 0.254: UI:SD.1 8.45,59.25 UI:R5.2
UI:N$8
  Bottom 0.254: UI:TSD.3 UI:TSTATE.3 UI:TRX.3 UI:TTX.3 17.78,22.71 16.83,21.76 UI:TB.2
UI:N$9
  Bottom 0.254: UI:STATE.2 15.35,48.26 UI:TSTATE.2
UI:N$10
  Bottom 0.254: UI:RX.2 15.35,35.56 UI:TRX.2
UI:N$11
  Bottom 0.254: UI:TX.2 15.35,22.86 UI:TTX.2
UI:N$12
  Bottom 0.254: UI:SD.2 15.35,60.96 UI:TSD.2
UI:N$13
  Bottom 0.254: UI:R8.2 128.58,13.93 UI:ENCODER.B 131.09,14.21 UI:R6.2
UI:N$14
  Bottom 0.254: UI:R9.1 127.12,8.93 UI:ENCODER.A 131.17,8.57 UI:R7.2

## Text on the board
tNames: 3V3 | 5V | NRST | 5V | SWDIO | GND | SWCLK | RX | DE | TX | 3,3V | DMX-Recorder V1 | Felix Bauer